# Altium PCB PCB_STM32.PcbDoc
Units mil, origin at the board's own origin, x right, y up, seen from the top; angles counter-clockwise.
Board outline 2415 x 2525 mil, 2 copper layers (Top Layer, Bottom Layer); 10 components, 17 nets, 80 pads, 0 vias.
Unrouted connection lines stored in the file: 2.
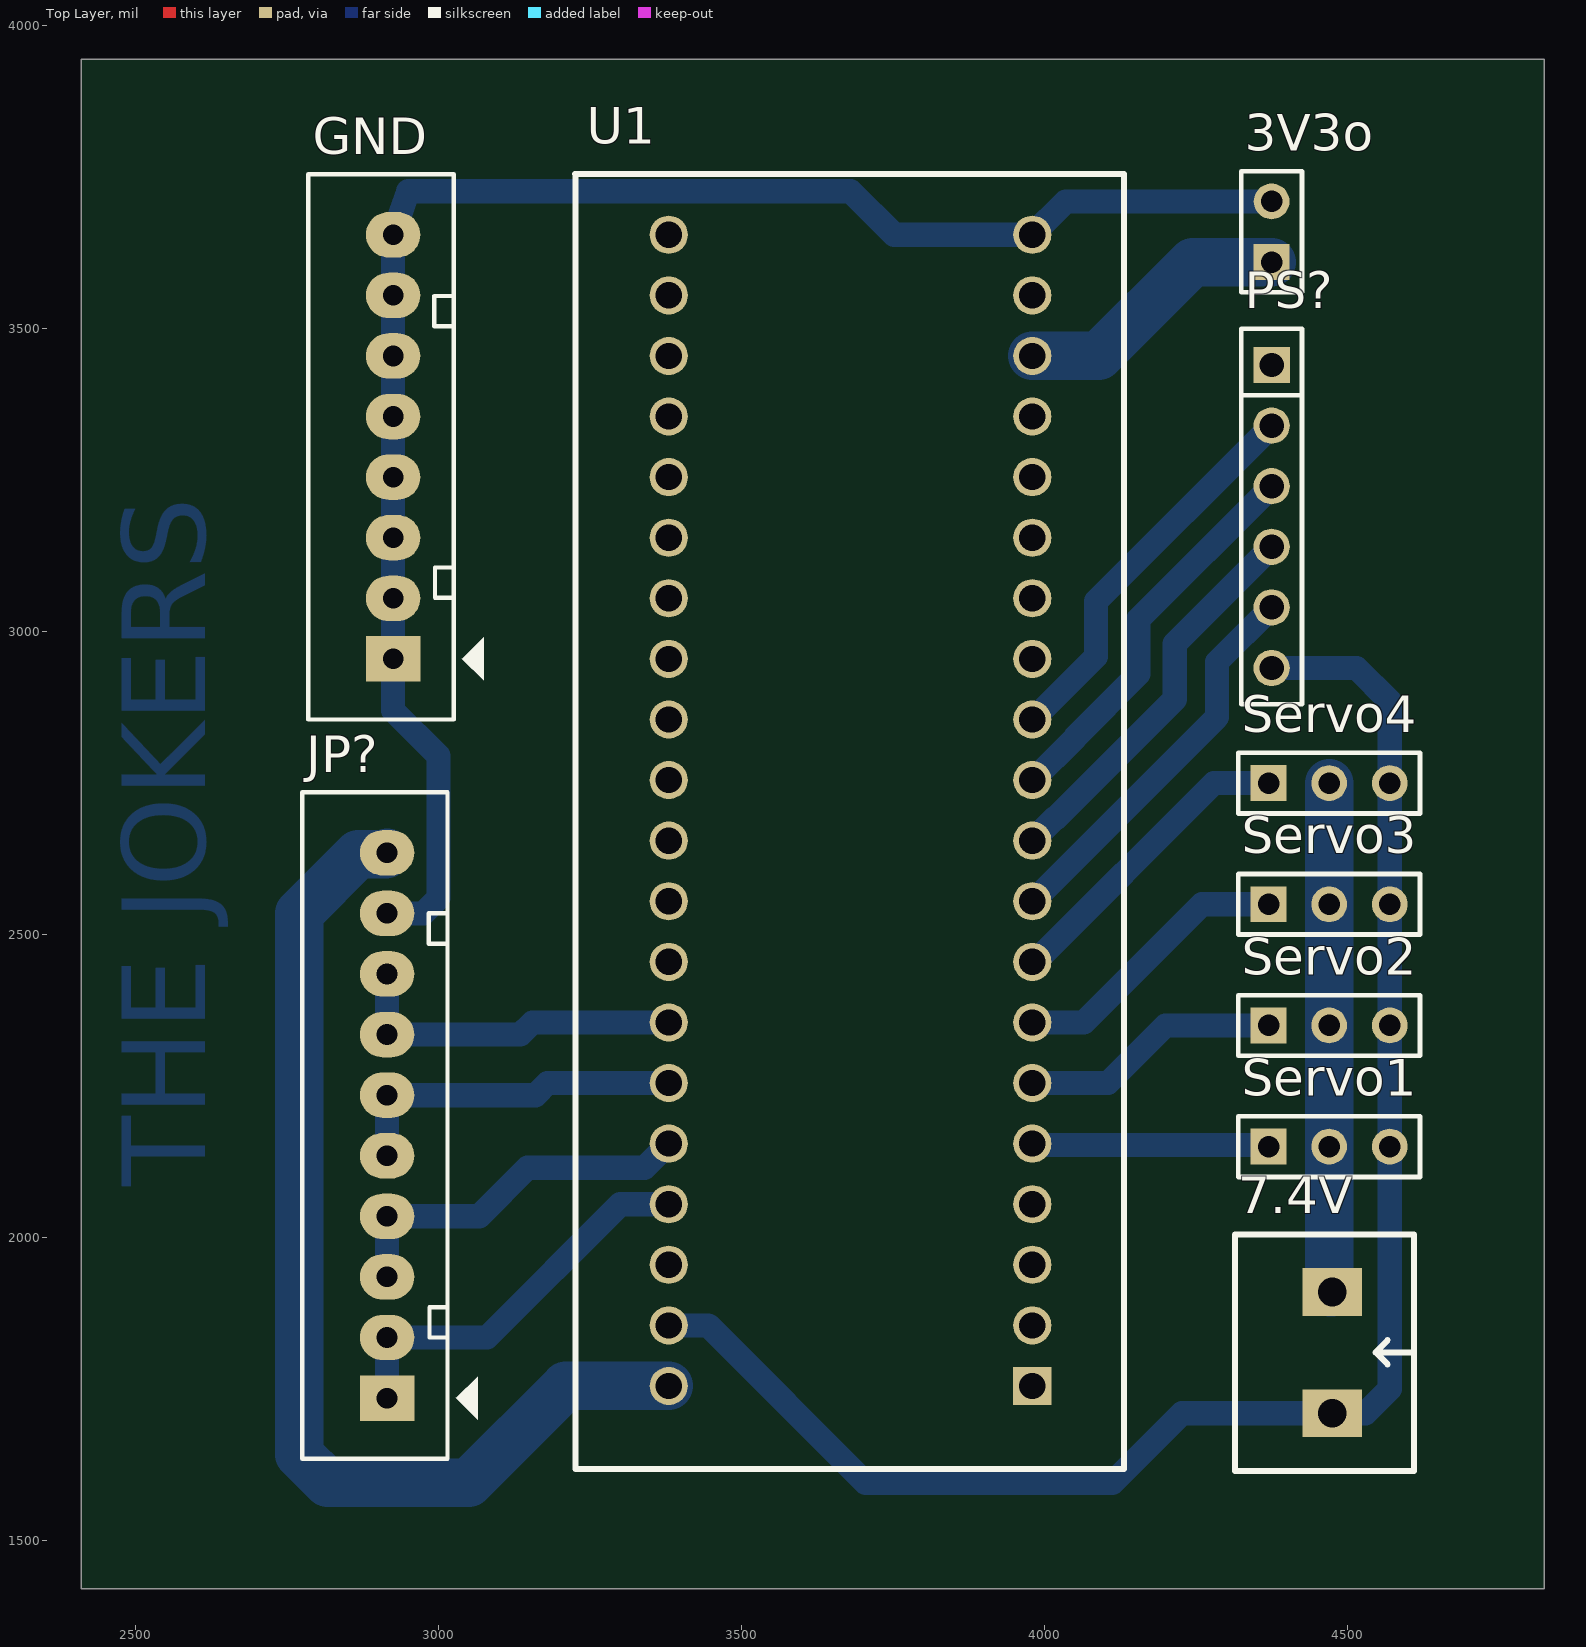
[diagram p0: Top Layer view]
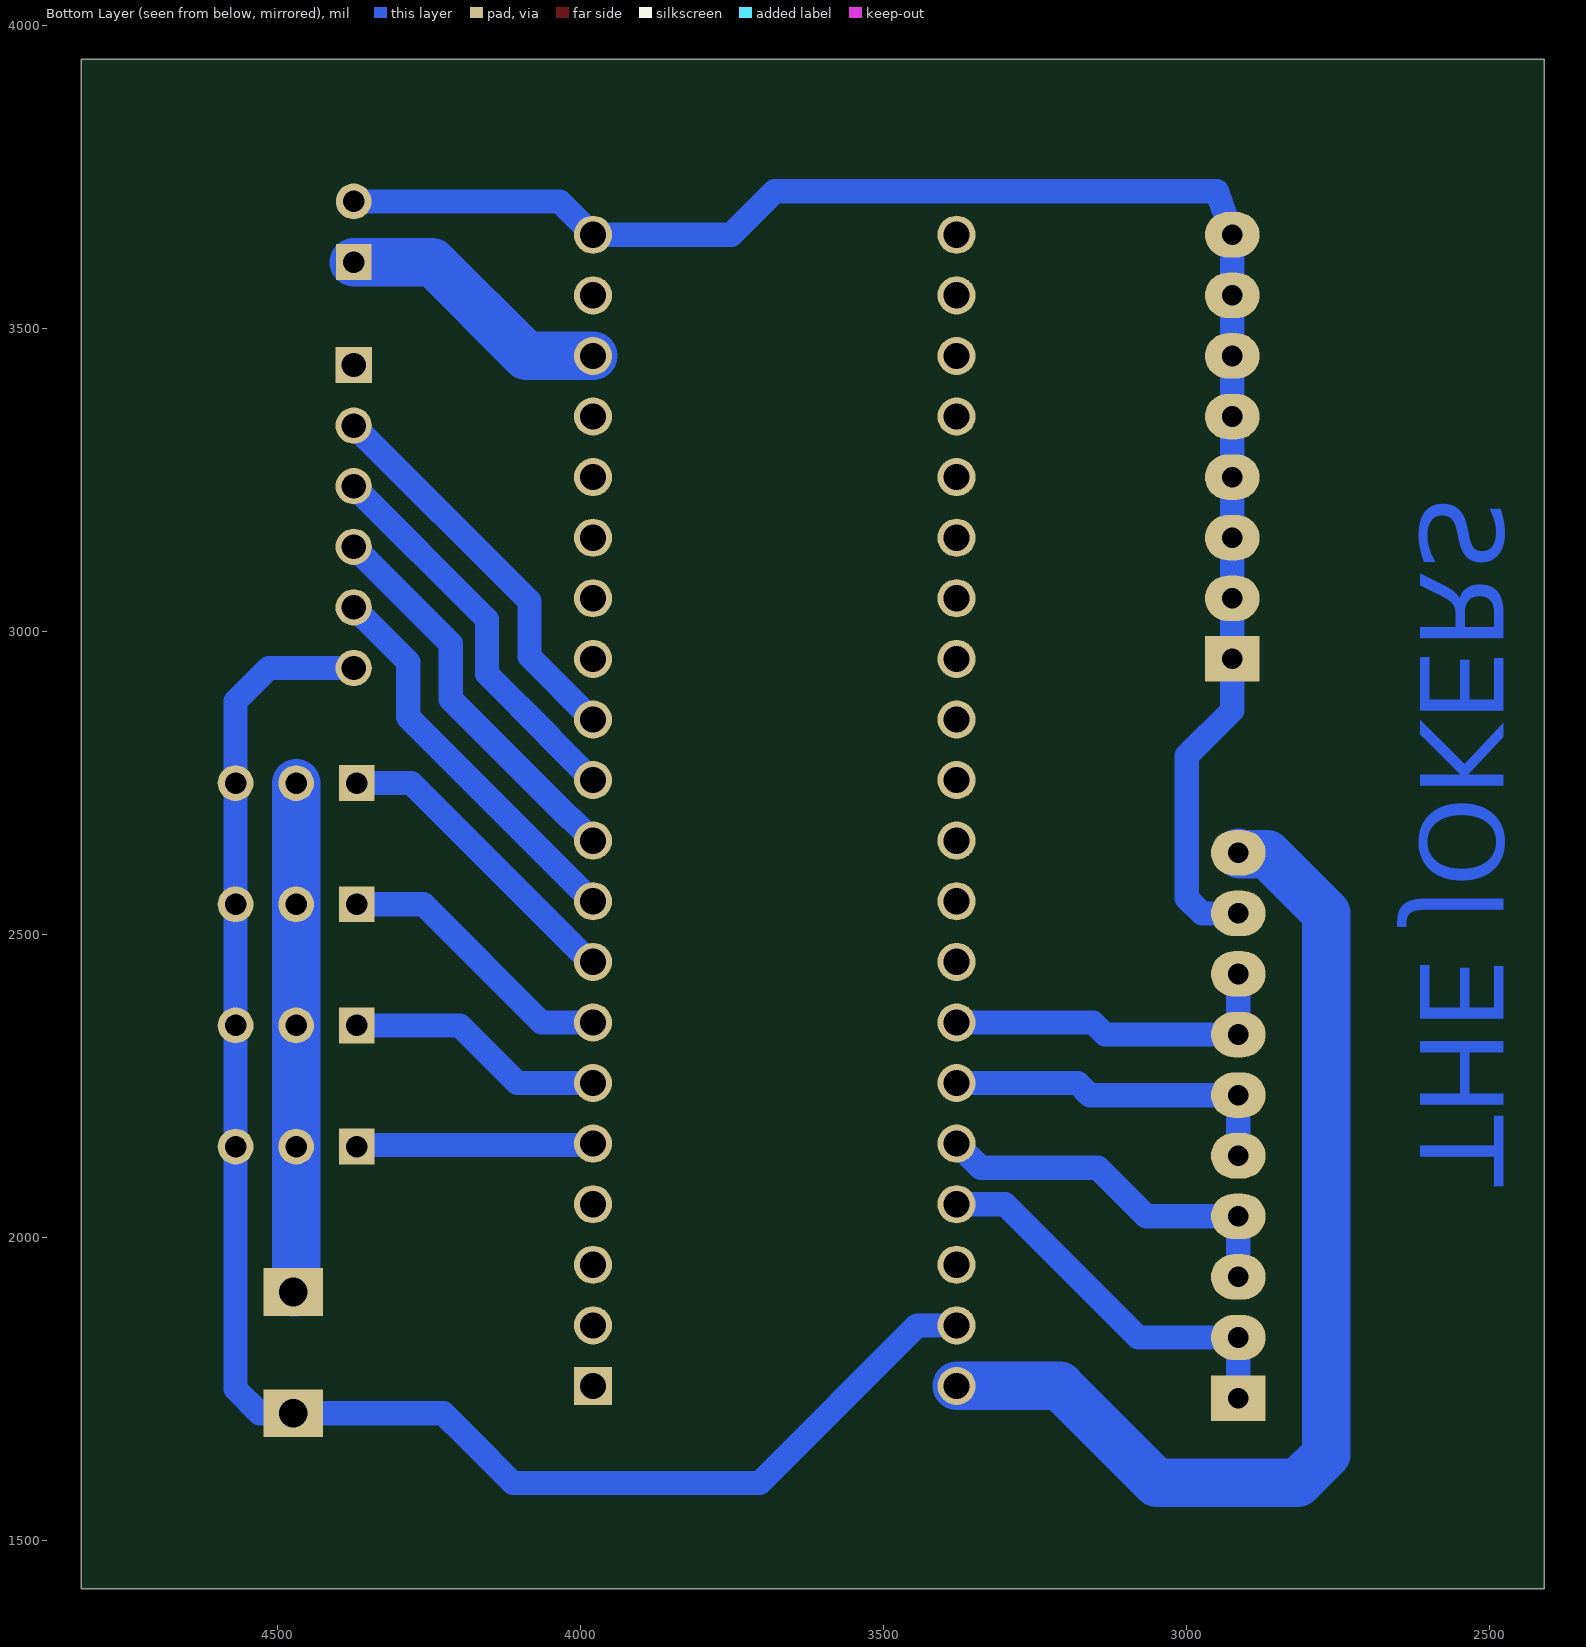
[diagram p1: Bottom Layer view, seen from below]

## Layer stack, top to bottom
Top Solder: solder mask 0.4, Solder Resist, Dk 3.5
Top Layer: signal copper 1.4
Dielectric 1: dielectric 12.6, FR-4, Dk 4.8
Bottom Layer: signal copper 1.4
Bottom Solder: solder mask 0.4, Solder Resist, Dk 3.5

## Board outline
2410,1420 4825,1420 4825,3945 2410,3945

## Design rules (kind name [scope] priority, off if disabled: settings)
Clearance [All] p1: gap=20 ignorepadtopadclearanceinfootprint=FALSE
PolygonConnect [All] p1: connectstyle=Relief reliefconductorwidth=10 reliefentries=4 polygonreliefangle="90 Angle" airgapwidth=10
RoutingVias [All] p1: holewidth=28 width=50 viastyle="Through Hole" minholewidth=28 minwidth=50 maxholewidth=28 maxwidth=50
SolderMaskExpansion [All] p1: expansion=4
Width [All] p1: maxlimit=80 minlimit=20 preferedwidth=40
30 further rules are at their usual default settings.

## Components (designator, comment, footprint, x,y, rotation, side; value= is the part's Value field where it differs from the comment)
3V3o "Header 2x1" HDR1X2 4375,3610 r90 top
7.4V "Header 1 - M" "Medium - Header 2" 4475,1810 r270 top
GND "JP8" Header8 2925,2955 r90 top value="Connector 8"
JP? "JP10" Header10 2915,1735 r90 top value="Connector 10"
PS? "JP6" JP6-C1T 4375,3440 r270 top
Servo1 "Header 3x1" HDR1X3 4370,2150 r0 top
Servo2 "Header 3x1" HDR1X3 4370,2350 r0 top
Servo3 "Header 3x1" HDR1X3 4370,2550 r0 top
Servo4 "Header 3x1" HDR1X3 4370,2750 r0 top
U1 "Bluepill" "Blue Pill" 3380,1755 r0 top (schematic designator U?)

## Footprints (in the part's own frame and the unit in brackets; to place one, negate y for a bottom-side part, rotate by r counter-clockwise, add the part's x,y. Pads: shape width x height; smd on the part's side, far side on the other; paste and mask are expansions set on the pad)
"Blue Pill" [mm]
  round 1.6 hole 1.1: 1(0,48.26) 2(0,45.72) 3(0,43.18) 4(0,40.64) 5(0,38.1) 6(0,35.56) 7(0,33.02) 8(0,30.48) 9(0,27.94) 10(0,25.4) 11(0,22.86) 12(0,20.32) 13(0,17.78) 14(0,15.24) 15(0,12.7) 16(0,10.16) 17(0,7.62) 18(0,5.08) 19(0,2.54) 20(0,0) 22(15.24,2.54) 23(15.24,5.08) 24(15.24,7.62) 25(15.24,10.16) 26(15.24,12.7) 27(15.24,15.24) 28(15.24,17.78) 29(15.24,20.32) 30(15.24,22.86) 31(15.24,25.4) 32(15.24,27.94) 33(15.24,30.48) 34(15.24,33.02) 35(15.24,35.56) 36(15.24,38.1) 37(15.24,40.64) 38(15.24,43.18) 39(15.24,45.72) 40(15.24,48.26)
  rect 1.6x1.6 hole 1.1: 21(15.24,0)
  silkscreen extent -3.94,-3.48 19.08,50.8, body extent -3.81,-3.48 19.05,50.8, height 3.56
HDR1X2 [mm] "Connector; Header; 2 Position"
  rect 1.5x1.5 hole 0.9: 1(0,0)
  round 1.5 hole 0.9: 2(2.54,0)
  silkscreen extent -1.27,-1.27 3.81,1.27, body extent -1.27,-1.27 3.81,1.27, height 7
HDR1X3 [mm] "Connector; Header; 3 Position"
  rect 1.5x1.5 hole 0.9: 1(0,0)
  round 1.5 hole 0.9: 2(2.54,0) 3(5.08,0)
  silkscreen extent -1.27,-1.27 6.35,1.27, body extent -1.27,-1.27 6.35,1.27, height 7
Header8 [mil] "CON8"
  rect 75x90 hole 34: 1(0,0)
  oval 75x90 hole 34: 2(100,0) 3(200,0) 4(300,0) 5(400,0) 6(500,0) 7(600,0) 8(700,0)
  silkscreen extent -100,-150 800,140
Header10 [mil] "CON10"
  rect 75x90 hole 34: 1(0,0)
  oval 75x90 hole 34: 2(100,0) 3(200,0) 4(300,0) 5(400,0) 6(500,0) 7(600,0) 8(700,0) 9(800,0) 10(900,0)
  silkscreen extent -100,-150 1000,140
JP6-C1T [mm] "6 row, straight, gold plating"
  rect 1.52x1.52 hole 1.02: 1(0,0)
  round 1.52 hole 1.02: 2(2.54,0) 3(5.08,0) 4(7.62,0) 5(10.16,0) 6(12.7,0)
  silkscreen extent -1.52,-1.27 14.22,1.27, body extent -1.52,-1.25 14.22,1.25, height 8.51
"Medium - Header 2" [mm]
  rect 2x2.5 hole 1.2: 1(-2.54,0) 2(2.54,0)
  silkscreen extent -4.95,-4.08 4.95,3.43, body extent -5,-4.07 5,3.43, height 10

## Part data
3V3o: "Header, 2-Pin, pitch 2.54mm", Solder=WAVE
7.4V: library part "Header 2 - M", "Header, 2-Pin, Medium", LatestRevisionDate=17-Jul-2002, LatestRevisionNote="Re-released for DXP Platform.", Publisher="Altium Limited"
GND: library part Header8, "Connector 8"
JP?: library part Header10, "Connector 10"
PS?: "WR-PHD 2.54 mm Angled Socket Header", Manufacturer="Würth Elektronik eiSos GmbH", partNo=613006143121, ComponentLink1 Description=Manufacturer, ComponentLink1URL=http://www.we-online.com, ComponentLink2 Description=Datasheet, ComponentLink2URL=http://katalog.we-online.de/em/datasheet/6130xx143121.pdf, Created by="Karrer Zheng", Created Date="29 March 2013", NoPins=06
Servo1 Servo2 Servo3 Servo4: "Header, 3-Pin, pitch 2.54mm", Solder=WAVE
U1: library part STM32F103C8T6, "STM32F103C8T6"

## Nets (pads, with @x,y where several pads share a name; then routed paths per layer and width w, separated by ;. In a path a pad name is that pad's centre, name@x,y a point inside that pad or via, vN(x,y) a via of type N, cw(c..) or ccw(c..) an arc to the next point about the centre after c; other vN are vias at no path point)
3V3: JP?.10 U1.20 | length 1775.5
  Bottom Layer w80: JP?.10 2912.5,2632.5 2867.11,2632.5 2770,2535.39 2770,1641.86 2816.86,1595 3050,1595 3210,1755 U1.20
3V3o: 3V3o.1 U1.38 | length 459.2
  Bottom Layer w80: U1.38 4090,3455 4245,3610 3V3o.1
+5Vo: PS?.1
+7.4: 7.4V.1 Servo1.2 Servo2.2 Servo3.2 Servo4.2 | length 844.6
  Bottom Layer w80: Servo4.2 Servo3.2 Servo2.2 Servo1.2 4470,1910.63 4470.63,1910 7.4V.1
ATT: PS?.5 U1.29 | length 649.3
  Bottom Layer w40: U1.29 3981.11,2555 4285,2858.89 4285,2950 PS?.5
CMD: PS?.3 U1.31 | length 649.3
  Bottom Layer w40: U1.31 3981.11,2755 4051.5,2825.39 4051.5,2826.5 4155,2930 4155,3020 PS?.3
DATA: PS?.2 U1.32 | length 649.3
  Bottom Layer w40: U1.32 3981.11,2855 4085,2958.89 4085,3050 PS?.2
GND: 3V3o.2 7.4V.2 GND.1 GND.2 GND.3 GND.4 GND.5 GND.6 GND.7 GND.8 JP?.9 PS?.6 Servo1.3 Servo2.3 Servo3.3 Servo4.3 U1.19 U1.39 U1.40 | length 5489.9
  Bottom Layer w40: JP?.9 2975,2535 3000,2560 3000,2795 2925,2870 GND.1 GND.2 GND.3 GND.4 GND.5 GND.6 GND.7 GND.8 2950,3727 3680,3727 3752,3655 U1.40 4035,3710 3V3o.2 ; U1.19 3445,1855 3705,1595 4112,1595 4187,1670 4227,1710 7.4V.2 4530,1710 4570,1750 Servo1.3 Servo2.3 Servo3.3 Servo4.3 4570,2885 4515,2940 PS?.6
IN11: JP?.1 JP?.2 U1.17 | length 656.1
  Bottom Layer w40: JP?.1 JP?.2 3080,1835 3300,2055 U1.17
IN12: JP?.3 JP?.4 U1.16 | length 614.7
  Bottom Layer w40: JP?.3 JP?.4 3067,2035 3147,2115 3340,2115 U1.16
IN13: JP?.5 JP?.6 U1.15 | length 573.3
  Bottom Layer w40: JP?.5 JP?.6 3160,2235 3180,2255 U1.15
IN14: JP?.7 JP?.8 U1.14 | length 573.3
  Bottom Layer w40: JP?.8 JP?.7 3135,2335 3155,2355 U1.14
PulseS1: Servo1.1 U1.25 | length 392.1
  Bottom Layer w40: U1.25 3982.5,2152.5 4367.5,2152.5 Servo1.1
PulseS2: Servo2.1 U1.26 | length 429.4
  Bottom Layer w40: U1.26 4105,2255 4200,2350 Servo2.1
PulseS3: Servo3.1 U1.27 | length 470.8
  Bottom Layer w40: U1.27 4065,2355 4260,2550 Servo3.1
PulseS4: Servo4.1 U1.28 | length 512.2
  Bottom Layer w40: U1.28 3985,2455 4280,2750 Servo4.1
SCK: PS?.4 U1.30 | length 649.6
  Bottom Layer w40: U1.30 4017,2692 4018.63,2692 4215,2888.37 4215,2980 PS?.4
pads on no net: U1.1 U1.2 U1.3 U1.4 U1.5 U1.6 U1.7 U1.8 U1.9 U1.10 U1.11 U1.12 U1.13 U1.18 U1.21 U1.22 U1.23 U1.24 U1.33 U1.34 U1.35 U1.36 U1.37

## Other copper
Bottom Layer:
  text "THE JOKERS" at 2660,2085 h236.22 r90